# Altium PCB ISL-IP_LAYOUT.PcbDoc
Units mm, origin at the board's own origin, x right, y up, seen from the top; angles counter-clockwise.
Board outline 388 x 82 mm, 4 copper layers (Top Layer, Signal Layer 1, Signal Layer 2, Bottom Layer), stack 1.753 mm thick; 21 components, 2 nets, 45 pads, 402 vias.
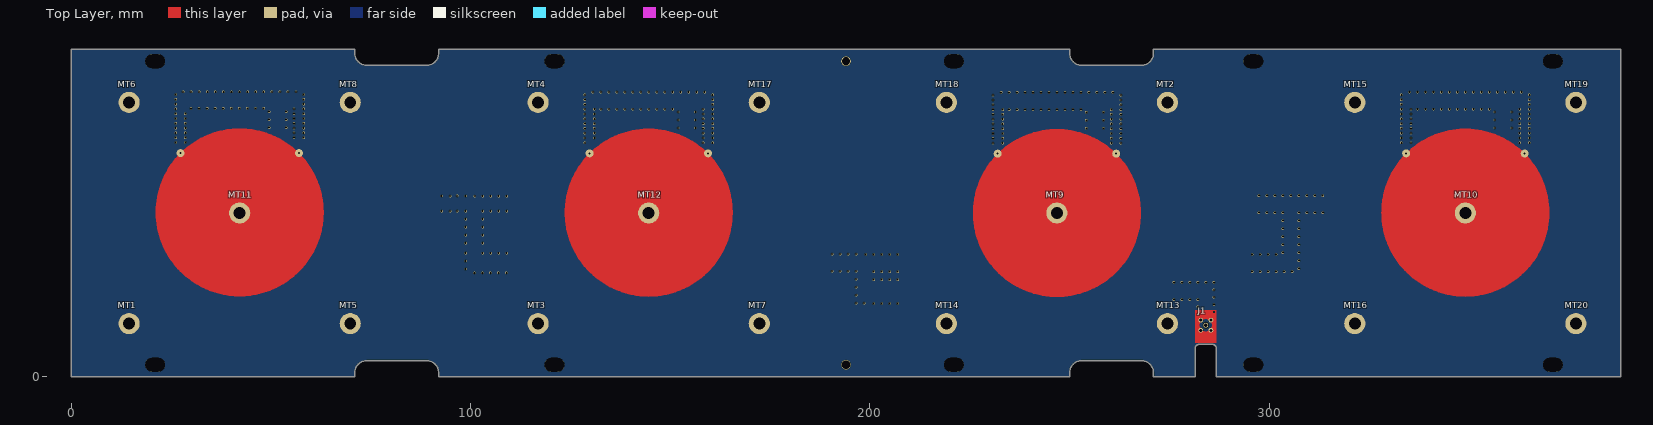
[diagram p0: Top Layer view]
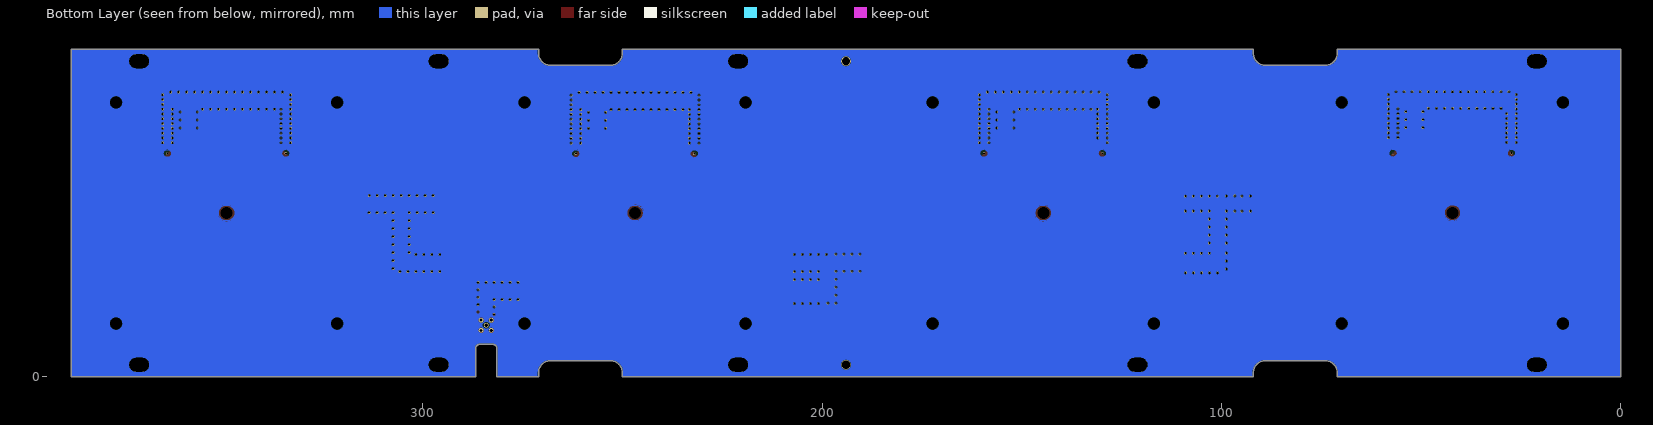
[diagram p1: Bottom Layer view, seen from below]
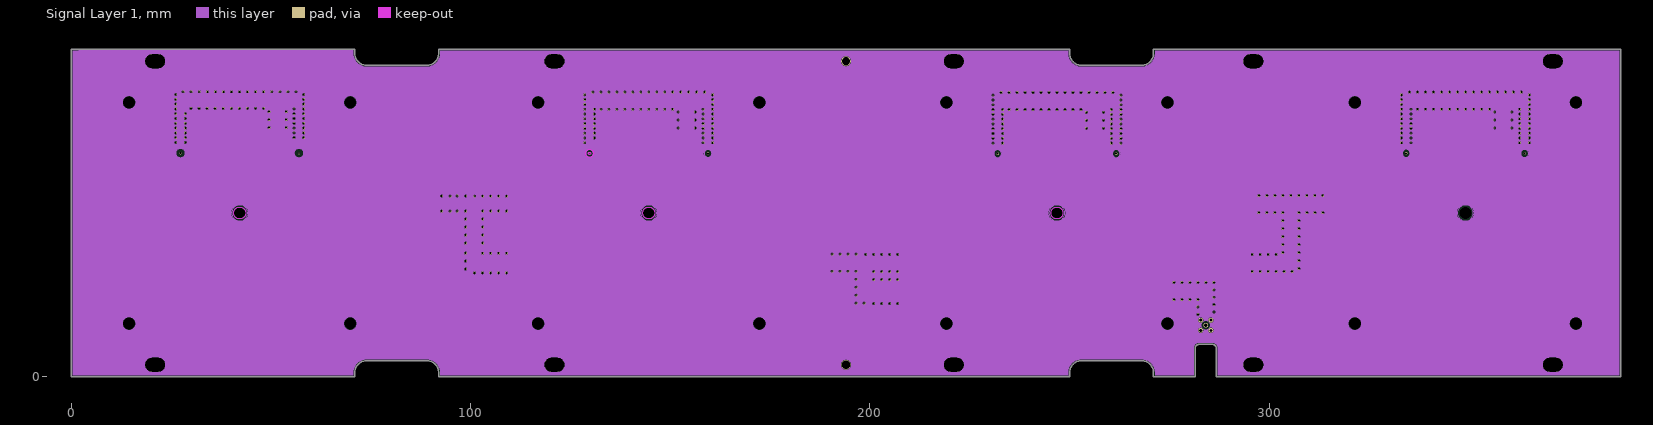
[diagram p2: Signal Layer 1]
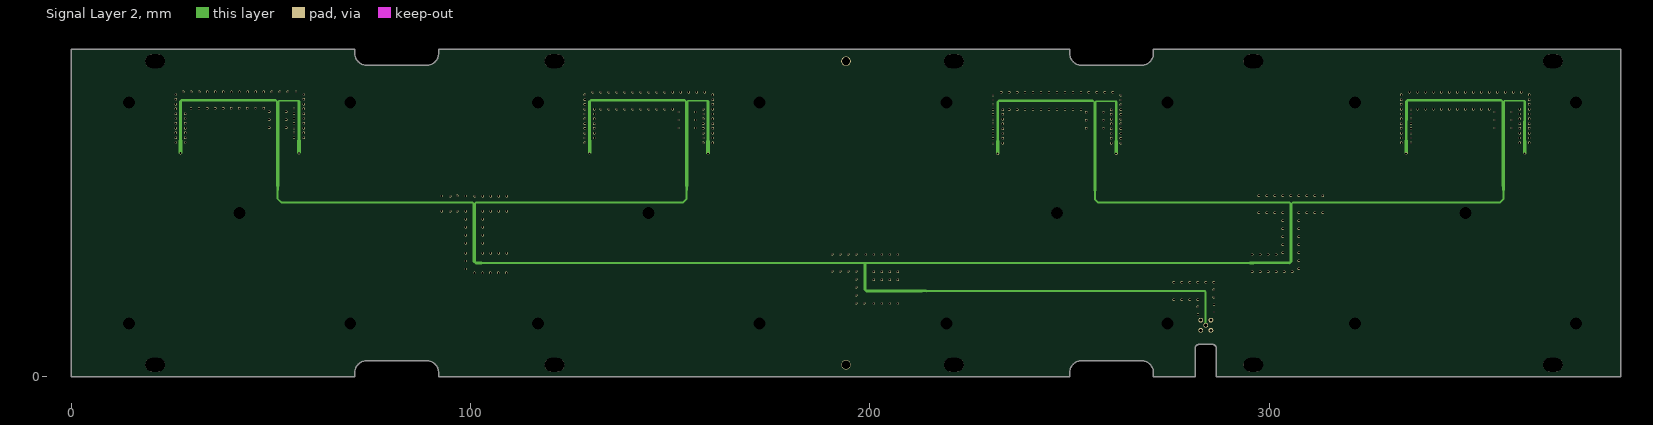
[diagram p3: Signal Layer 2]

## Layer stack, top to bottom
Top Solder: solder mask 0.0102, Solder Resist, Dk 3.5
Top Layer: signal copper 0.035
Dielectric 1: core 0.813, RO4003C, Dk 3.38
Signal Layer 1: signal copper 0.035
Dielectric 2: core 0.2, Composite dielectric, Dk 3.5
Dielectric 3: core 0.2, Composite dielectric, Dk 3.5
Signal Layer 2: signal copper 0.035
Dielectric 4: core 0.2, Composite dielectric, Dk 3.5
Dielectric 5: core 0.2, Composite dielectric, Dk 3.5
Bottom Layer: signal copper 0.035
Bottom Solder: solder mask 0.0102, Solder Resist, Dk 3.5

## Board outline
0,0 71,0 71,1 cw(c74,1) 71.879,3.121 cw(c74,1) 74,4 89,4 cw(c89,1) 91.121,3.121 cw(c89,1) 92,1 92,0 250,0 250,1 cw(c253,1) 250.879,3.121 cw(c253,1) 253,4 268,4 cw(c268,1) 270.121,3.121 cw(c268,1) 271,1 271,0 281.432,0 281.432,7.1 cw(c282.432,7.1) 281.725,7.807 cw(c282.432,7.1) 282.432,8.1 285.734,8.1 cw(c285.734,7.1) 286.441,7.807 cw(c285.734,7.1) 286.734,7.1 286.734,0 388,0 388,82 271,82 271,81 cw(c268,81) 270.121,78.879 cw(c268,81) 268,78 253,78 cw(c253,81) 250.879,78.879 cw(c253,81) 250,81 250,82 92,82 92,81 cw(c89,81) 91.121,78.879 cw(c89,81) 89,78 74,78 cw(c74,81) 71.879,78.879 cw(c74,81) 71,81 71,82 0,82

## Design rules (kind name [scope] priority, off if disabled: settings)
BoardOutlineClearance [All] p1: gap=0.254 ignorepadtopadclearanceinfootprint=FALSE except(0: Arc-SplitContinuation Track-SplitContinuation SMDPad-SplitContinuation THPad-SplitContinuation Via-SplitContinuation Fill-SplitContinuation Poly-SplitContinuation Region-SplitContinuation Text-SplitContinuation)
Clearance Clearance_1 [All] p1 off: gap=0.254 ignorepadtopadclearanceinfootprint=FALSE except(0: Arc-Hole Track-Hole SMDPad-Hole THPad-Hole Via-Hole Fill-Hole Poly-Hole Region-Hole Text-Hole)
DiffPairsRouting [All] p1 off: maxlimit=0.254 minlimit=0.254 mostfreqgap=0.254 toplayer_minwidth=0.381 toplayer_maxwidth=0.381 toplayer_prefwidth=0.381 midlayer1_minwidth=0.381 midlayer1_maxwidth=0.381 midlayer1_prefwidth=0.381 midlayer2_minwidth=0.381 midlayer2_maxwidth=0.381 midlayer2_prefwidth=0.381 bottomlayer_minwidth=0.381 bottomlayer_maxwidth=0.381 bottomlayer_prefwidth=0.381 maxuncoupledlength=12.7
FanoutControl Fanout_BGA [IsBGA] p1 off: bgadir=Out bgaviamode=Centered fanoutstyle=Auto fanoutdirection=Alternating viagrid=0.025 // Fanout_BGA (Default Rule)
FanoutControl Fanout_LCC [IsLCC] p2 off: bgadir=Out bgaviamode=Centered fanoutstyle=Auto fanoutdirection=Alternating viagrid=0.025 // Fanout_LCC (Default Rule)
FanoutControl Fanout_SOIC [IsSOIC] p3 off: bgadir=Out bgaviamode=Centered fanoutstyle=Auto fanoutdirection=Alternating viagrid=0.025 // Fanout_SOIC (Default Rule)
FanoutControl Fanout_Small [(CompPinCount < 5)] p4 off: bgadir=Out bgaviamode=Centered fanoutstyle=Auto fanoutdirection=OutThenIn viagrid=0.025 // Fanout_Small (Default Rule)
FanoutControl Fanout_Default [All] p5 off: bgadir=Out bgaviamode=Centered fanoutstyle=Auto fanoutdirection=Alternating viagrid=0.025 // Fanout_Default (Default Rule)
HoleSize [All] p1: absolutevalues=TRUE maxlimit=5 minlimit=0.025 maxpercent=80.000 minpercent=20.000
PolygonConnect [All] p1: connectstyle=NoConnect reliefconductorwidth=0.254 reliefentries=4 polygonreliefangle="90 Angle" airgapwidth=0.254
RoomDefinition am2067_4R_PCB [InComponentClass('am2067_4R_PCB')] p1: confinementstyle=ConfineIn formatcopy=TRUE lockcomponents=FALSE outline -141.402,-204.877 -90.602,-204.877 -90.602,-179.477 -141.402,-179.477
RoutingCorners [All] p1 off: cornerstyle=45-Degree minsetback=2.54 maxsetback=2.54
RoutingLayers [All] p1 off: top layer_v5=TRUE mid layer 1_v5=TRUE mid layer 2_v5=TRUE bottom layer_v5=TRUE
RoutingPriority [All] p1 off: routingpriority=0
RoutingTopology [All] p1 off: topology=Shortest
RoutingVias [All] p1 off: holewidth=0.711 width=1.27 viastyle="Through Hole" minholewidth=0.711 minwidth=1.27 maxholewidth=0.711 maxwidth=1.27
ShortCircuit [All] p1: allowed=TRUE
SolderMaskExpansion [All] p1: expansion=0.102
Width [All] p1 off: maxlimit=0.254 minlimit=0.254 preferedwidth=0.254
18 further rules are at their usual default settings.

## Classes and differential pairs
component class am2067_4R_PCB: MT6

## Components (designator, comment, footprint, x,y, rotation, side; value= is the part's Value field where it differs from the comment)
J1 "SMP Male R/A TH" SF1212-6000-TD 284.1,12.9 r0 top
MT1 "9774060243R" SMT_spacer_M2_6mm 14.48,13.31 r0 top
MT2 "9774060243R" SMT_spacer_M2_6mm 274.5,68.69 r0 top
MT3 "9774060243R" SMT_spacer_M2_6mm 116.91,13.31 r0 top
MT4 "9774060243R" SMT_spacer_M2_6mm 116.91,68.69 r0 top
MT5 "9774060243R" SMT_spacer_M2_6mm 69.86,13.31 r0 top
MT6 "9774060243R" SMT_spacer_M2_6mm 14.48,68.69 r0 top
MT7 "9774060243R" SMT_spacer_M2_6mm 172.29,13.31 r0 top
MT8 "9774060243R" SMT_spacer_M2_6mm 69.86,68.69 r0 top
MT9 "9774060243R modified with no plating through the hole (specific case to ISL-IP component)" "SMT_spacer_M2_6mm differentiation with CMP-024-0033" 246.82,41 r0 top
MT10 "9774060243R modified with no plating through the hole (specific case to ISL-IP component)" "SMT_spacer_M2_6mm differentiation with CMP-024-0033" 349.09,41 r0 top
MT11 "9774060243R modified with no plating through the hole (specific case to ISL-IP component)" "SMT_spacer_M2_6mm differentiation with CMP-024-0033" 42.17,41 r0 top
MT12 "9774060243R modified with no plating through the hole (specific case to ISL-IP component)" "SMT_spacer_M2_6mm differentiation with CMP-024-0033" 144.6,41 r0 top
MT13 "9774060243R" SMT_spacer_M2_6mm 274.5,13.31 r0 top
MT14 "9774060243R" SMT_spacer_M2_6mm 219.13,13.31 r0 top
MT15 "9774060243R" SMT_spacer_M2_6mm 321.4,68.69 r0 top
MT16 "9774060243R" SMT_spacer_M2_6mm 321.4,13.31 r0 top
MT17 "9774060243R" SMT_spacer_M2_6mm 172.29,68.69 r0 top
MT18 "9774060243R" SMT_spacer_M2_6mm 219.13,68.69 r0 top
MT19 "9774060243R" SMT_spacer_M2_6mm 376.78,68.69 r0 top
MT20 "9774060243R" SMT_spacer_M2_6mm 376.78,13.31 r0 top

## Footprints (in the part's own frame and the unit in brackets; to place one, negate y for a bottom-side part, rotate by r counter-clockwise, add the part's x,y. Pads: shape width x height; smd on the part's side, far side on the other; paste and mask are expansions set on the pad)
SF1212-6000-TD [mm] "SMP Male PCB Thru-Hole Connector, R/A, FD"
  round 1.2 hole 0.76: 0(-1.27,-1.27) 0(-1.27,1.27) 0(1.27,-1.27) 0(1.27,1.27)
  round 1.2 hole 0.84: 1(0,0)
  body extent -2,-6.46 2.17,1.66, height 4.46
SMT_spacer_M2_6mm [mm] "Pem Nut , Surface Mount Nuts and Spacers/Standoffs"
  round 5.3 / inner oval 5.3x0 / far side oval 5.3x0 hole 3 paste-6: 1(0,0)
  body extent -2.17,-2.17 2.18,2.17, height 6
"SMT_spacer_M2_6mm differentiation with CMP-024-0033" [mm] "Pem Nut , Surface Mount Nuts and Spacers/Standoffs"
  round 5.3 / inner oval 5.3x0 / far side oval 5.3x0 hole 3 paste-6: 1(0,0)
  body extent -2.17,-2.17 2.18,2.17, height 6

## Part data
J1: library part CMP-026-0147-5, "SMP Male PCB Thru-Hole Connector, R/A, FD", Manufacturer="Amphenol / SV Microwave", Manufacturer number=SF1212-6000, Height=4.2mm, InternalID=100288
MT1 MT2 MT3 MT4 MT5 MT6 MT7 MT8 MT13 MT14 MT15 MT16 MT17 MT18 MT19 MT20: library part CMP-024-0033-5, "Pem nut, Surface Mount Nuts and Spacer, M2, 6mm", Manufacturer="Wurth Electronik", Part Number=SMTSO-M3-3ET, Height=6mm, InternalID=100666, Manufacturer number=9774060243R, Old DB Number=17000000, Part status=Prototype, Symbol Name=MT_hole_1
MT9 MT10 MT11 MT12: library part CMP-024-0036-6, "Pem nut, Surface Mount Nuts and Spacer, M2, 6mm", Manufacturer="Wurth Electronik", Manufacturer number=9774060243R, Part Number=SMTSO-M3-3ET, Height=6mm, InternalID=100666, Old DB Number=17000000, Part status=Prototype, Symbol Name=MT_hole_1

## Free pads (board coordinates)
  round 2 smd: 3(27.352,56.008) 3(57.019,56.008) 3(129.781,55.938) 3(159.448,55.938) 3(231.969,55.849) 3(261.668,55.849) 3(334.271,55.938) 3(363.938,55.902)
  oval 4.9x3.4 hole 3.4 slot 4.9 at 0 deg unplated: 6(21,3) 6(21,79) 6(121,3) 6(121,79) 6(221,3) 6(221,79) 6(296,3) 6(296,79) 6(371,3) 6(371,79)
  round 2.4 hole 2.1 unplated: 6(194,79)
  round 2.4 hole 2.2 unplated: 6(194,3)

## Via types
v1: diameter 0.6, hole 0.5, Top Layer to Bottom Layer, 402 vias

## Nets (pads, with @x,y where several pads share a name; then routed paths per layer and width w, separated by ;. In a path a pad name is that pad's centre, name@x,y a point inside that pad or via, vN(x,y) a via of type N, cw(c..) or ccw(c..) an arc to the next point about the centre after c; other vN are vias at no path point)
GND: J1.0 MT1.1 MT2.1 MT3.1 MT4.1 MT5.1 MT6.1 MT7.1 MT8.1 MT13.1 MT14.1 MT15.1 MT16.1 MT17.1 MT18.1 MT19.1 MT20.1 pad.6
  other v1: 282.132,15.624 286.147,16.211 282.125,17.475 286.139,18.063 200.926,18.33 202.926,18.33 204.926,18.33 206.926,18.33 196.524,18.42 198.524,18.42 276.118,19.326 278.118,19.326 280.118,19.326 282.118,19.326 286.132,19.914 196.524,20.42 286.125,21.765 196.524,22.42 276.118,23.616 278.118,23.616 280.118,23.616 282.118,23.616 284.118,23.616 286.118,23.616 200.926,24.33 202.926,24.33 204.926,24.33 206.926,24.33 196.524,24.42 100.964,26.019 102.964,26.019 104.964,26.019 106.964,26.019 108.964,26.019 200.926,26.33 202.926,26.33 204.926,26.33 206.926,26.33 295.726,26.33 297.726,26.33 299.726,26.33 301.726,26.33 303.726,26.33 305.726,26.33 190.524,26.42 192.524,26.42 194.524,26.42 196.524,26.42 98.764,26.969 307.419,27.075 98.764,28.969 307.419,29.075 198.926,30.62 200.926,30.619 202.926,30.619 204.926,30.619 206.926,30.619 295.726,30.62 297.726,30.62 299.726,30.62 301.726,30.62 190.524,30.709 192.524,30.709 194.524,30.709 196.524,30.709 103.036,30.931 105.036,30.931 107.036,30.931 109.036,30.931 98.764,30.969 303.381,31.075 307.419,31.075 303.381,33.075 307.419,33.075 98.764,33.469 103.036,33.469 303.381,35.075 307.419,35.075 98.764,35.469 103.036,35.469 303.381,37.075 307.419,37.075 98.764,37.469 103.036,37.469 303.381,39.075 307.419,39.075 98.764,39.469 103.036,39.469 297.381,41.075 299.381,41.075 301.381,41.075 303.381,41.075 307.419,41.075 309.419,41.075 311.419,41.075 313.419,41.075 92.726,41.469 94.862,41.469 96.628,41.469 98.764,41.469 103.036,41.469 105.036,41.469 107.036,41.469 109.036,41.469 101.036,45.22 103.036,45.22 105.036,45.22 107.036,45.22 109.036,45.22 94.862,45.238 92.726,45.257 98.764,45.257 96.628,45.276 297.381,45.365 299.381,45.365 301.381,45.365 303.381,45.365 305.381,45.365 307.381,45.365 309.381,45.365 311.381,45.365 313.381,45.365 230.81,58.502 233.21,58.502 260.435,58.502 262.835,58.502 128.59,58.591 158.215,58.591 160.615,58.591 333.08,58.591 335.48,58.591 362.705,58.591 365.105,58.591 26.161,58.661 28.561,58.661 230.81,59.702 233.21,59.702 260.435,59.702 262.835,59.702 128.59,59.791 130.99,59.791 158.215,59.791 160.615,59.791 333.08,59.791 335.48,59.791 362.705,59.791 365.105,59.791 26.161,59.861 28.561,59.861 55.786,59.861 58.186,59.861 230.81,60.902 233.21,60.902 260.435,60.902 262.835,60.902 128.59,60.991 130.99,60.991 158.215,60.991 160.615,60.991 333.08,60.991 335.48,60.991 362.705,60.991 365.105,60.991 26.161,61.061 28.561,61.061 55.786,61.061 58.186,61.061 230.81,62.102 233.21,62.102 260.435,62.102 262.835,62.102 128.59,62.191 130.99,62.191 158.215,62.191 160.615,62.191 333.08,62.191 335.48,62.191 362.705,62.191 365.105,62.191 254.19,62.202 258.48,62.202 26.161,62.261 28.561,62.261 55.786,62.261 58.186,62.261 151.97,62.291 156.26,62.291 356.46,62.291 360.75,62.291 49.541,62.361 53.831,62.361 230.81,63.302 233.21,63.302 260.435,63.302 262.835,63.302 128.59,63.391 130.99,63.391 158.215,63.391 160.615,63.391 333.08,63.391 335.48,63.391 362.705,63.391 365.105,63.391 26.161,63.461 28.561,63.461 55.786,63.461 58.186,63.461 254.19,64.202 258.48,64.202 151.97,64.291 156.26,64.291 356.46,64.291 360.75,64.291 49.541,64.361 53.831,64.361 230.81,64.502 233.21,64.502 260.435,64.502 262.835,64.502 128.59,64.591 130.99,64.591 158.215,64.591 160.615,64.591 333.08,64.591 335.48,64.591 362.705,64.591 365.105,64.591 26.161,64.661 28.561,64.661 55.786,64.661 58.186,64.661 230.81,65.702 233.21,65.702 260.435,65.702 262.835,65.702 128.59,65.791 130.99,65.791 158.215,65.791 160.615,65.791 333.08,65.791 335.48,65.791 362.705,65.791 365.105,65.791 26.161,65.861 28.561,65.861 55.786,65.861 58.186,65.861 254.19,66.202 258.48,66.202 151.97,66.291 156.26,66.291 356.46,66.291 360.75,66.291 49.541,66.361 53.831,66.361 230.81,66.902 233.21,66.902 234.835,66.902 236.835,66.902 238.835,66.902 240.835,66.902 242.835,66.902 244.835,66.902 246.835,66.902 248.835,66.902 250.835,66.902 252.835,66.902 260.435,66.902 262.835,66.902 128.59,66.991 130.99,66.991 132.615,66.991 134.615,66.991 136.615,66.991 138.615,66.991 140.615,66.991 142.615,66.991 144.615,66.991 146.615,66.991 148.615,66.991 150.615,66.991 158.215,66.991 160.615,66.991 333.08,66.991 335.48,66.991 337.105,66.991 339.105,66.991 341.105,66.991 343.105,66.991 345.105,66.991 347.105,66.991 349.105,66.991 351.105,66.991 353.105,66.991 355.105,66.991 362.705,66.991 365.105,66.991 26.161,67.061 55.786,67.061 58.186,67.061 29.974,67.199 31.994,67.199 34.014,67.199 36.034,67.199 38.054,67.199 40.074,67.199 42.094,67.199 44.114,67.199 46.134,67.199 48.154,67.199 230.81,68.102 262.835,68.102 128.59,68.191 160.615,68.191 333.08,68.191 365.105,68.191 26.161,68.261 58.186,68.261 230.81,69.302 262.835,69.302 128.59,69.391 160.615,69.391 333.08,69.391 365.105,69.391 26.161,69.461 58.186,69.461 230.81,70.502 262.835,70.502 128.59,70.591 160.615,70.591 333.08,70.591 365.105,70.591 26.161,70.661 58.186,70.661 232.835,71.192 234.835,71.192 236.835,71.192 238.835,71.192 240.835,71.192 242.835,71.192 244.835,71.192 246.835,71.192 248.835,71.192 250.835,71.192 252.835,71.192 254.835,71.192 256.835,71.192 258.835,71.192 260.835,71.192 130.615,71.281 132.615,71.281 134.615,71.281 136.615,71.281 138.615,71.281 140.615,71.281 142.615,71.281 144.615,71.281 146.615,71.281 148.615,71.281 150.615,71.281 152.615,71.281 154.615,71.281 156.615,71.281 158.615,71.281 335.105,71.281 337.105,71.281 339.105,71.281 341.105,71.281 343.105,71.281 345.105,71.281 347.105,71.281 349.105,71.281 351.105,71.281 353.105,71.281 355.105,71.281 357.105,71.281 359.105,71.281 361.105,71.281 363.105,71.281 27.996,71.351 30.016,71.351 32.036,71.351 34.056,71.351 36.076,71.351 38.096,71.351 40.116,71.351 42.136,71.351 44.156,71.351 46.176,71.351 48.196,71.351 50.216,71.351 52.236,71.351 54.256,71.351 56.276,71.351
NetJ1_1: J1.1 MT9.1 MT10.1 MT11.1 MT12.1 pad.3
  other v1: 231.969,55.849 261.668,55.849 363.938,55.902 129.781,55.938 159.448,55.938 334.271,55.938 27.352,56.008 57.019,56.008
copper on no net: | length 207.3
  Signal Layer 1 w0: 335.271,55.938 ccw(c334.271,55.938) 335.271,55.938 ; 335.271,55.938 ccw(c334.271,55.938) 335.271,55.938 ; 364.938,55.902 ccw(c363.938,55.902) 364.938,55.902 ; 364.938,55.902 ccw(c363.938,55.902) 364.938,55.902 ; 160.448,55.938 ccw(c159.448,55.938) 160.448,55.938 ; 232.969,55.849 ccw(c231.969,55.849) 232.969,55.849 ; 262.668,55.849 ccw(c261.668,55.849) 262.668,55.849
  Signal Layer 1 w0.1: 44.17,41 ccw(c42.17,41) 44.17,41 ; 130.781,55.938 ccw(c129.781,55.938) 130.781,55.938 ; 146.6,41 ccw(c144.6,41) 146.6,41 ; 248.82,41 ccw(c246.82,41) 248.82,41 ; 351.09,41 ccw(c349.09,41) 351.09,41
  Bottom Layer w0: 28.352,56.008 ccw(c27.352,56.008) 28.352,56.008 ; 44.116,41.071 ccw(c42.116,41.071) 44.116,41.071 ; 58.019,56.008 ccw(c57.019,56.008) 58.019,56.008 ; 130.781,55.938 ccw(c129.781,55.938) 130.781,55.938 ; 146.6,41 ccw(c144.6,41) 146.6,41 ; 160.448,55.938 ccw(c159.448,55.938) 160.448,55.938 ; 232.969,55.849 ccw(c231.969,55.849) 232.969,55.849 ; 248.82,41 ccw(c246.82,41) 248.82,41 ; 262.668,55.849 ccw(c261.668,55.849) 262.668,55.849 ; 335.271,55.938 ccw(c334.271,55.938) 335.271,55.938 ; 351.09,41 ccw(c349.09,41) 351.09,41 ; 364.938,55.902 ccw(c363.938,55.902) 364.938,55.902
  Bottom Layer w0.1: 285.1,12.9 ccw(c284.1,12.9) 285.1,12.9

## Polygon pours and split planes (outlines as drawn)
no net on Signal Layer 2 "Signal Layer 2-No Net" (solid, pour order 16): -141.402,234.573 -141.402,390.723 -141.402,403.123
no net on Signal Layer 1 "Top Layer-No Net" (none, pour order 22): 230.969,55.849 ccw(c231.969,55.849) 231.969,54.849 ccw(c231.969,55.849) 232.969,55.849 ccw(c231.969,55.849) 231.969,56.849 ccw(c231.969,55.849)
no net on Signal Layer 1 "Top Layer-No Net" (none, pour order 24): 260.668,55.849 ccw(c261.668,55.849) 261.668,54.849 ccw(c261.668,55.849) 262.668,55.849 ccw(c261.668,55.849) 261.668,56.849 ccw(c261.668,55.849)
no net on Signal Layer 1 "Top Layer-No Net" (none, pour order 28): 230.969,55.849 ccw(c231.969,55.849) 231.969,54.849 ccw(c231.969,55.849) 232.969,55.849 ccw(c231.969,55.849) 231.969,56.849 ccw(c231.969,55.849)
no net on Signal Layer 1 "Top Layer-No Net" (none, pour order 18): 128.781,55.938 ccw(c129.781,55.938) 129.781,54.938 ccw(c129.781,55.938) 130.781,55.938 ccw(c129.781,55.938) 129.781,56.938 ccw(c129.781,55.938)
no net on Signal Layer 1 "Top Layer-No Net" (none, pour order 32): 128.781,55.938 ccw(c129.781,55.938) 129.781,54.938 ccw(c129.781,55.938) 130.781,55.938 ccw(c129.781,55.938) 129.781,56.938 ccw(c129.781,55.938)
no net on Signal Layer 1 "Top Layer-No Net" (none, pour order 20): 158.448,55.938 ccw(c159.448,55.938) 159.448,54.938 ccw(c159.448,55.938) 160.448,55.938 ccw(c159.448,55.938) 159.448,56.938 ccw(c159.448,55.938)
no net on Signal Layer 1 "Top Layer-No Net" (none, pour order 30): 158.448,55.938 ccw(c159.448,55.938) 159.448,54.938 ccw(c159.448,55.938) 160.448,55.938 ccw(c159.448,55.938) 159.448,56.938 ccw(c159.448,55.938)

## Keep-outs
Signal Layer 1:
  region: 253 vertices and 1 holes, not listed, extent 40.669,39.499 43.671,42.501
  region: 253 vertices and 1 holes, not listed, extent 143.099,39.499 146.101,42.501
  region: 253 vertices and 1 holes, not listed, extent 245.319,39.499 248.321,42.501
  region: 131 vertices and 1 holes, not listed, extent 129.48,55.637 130.082,56.239
  region: 65 vertices and 1 holes, not listed, extent 128.781,54.938 130.781,56.937

## Other copper
Top Layer:
  region net NetJ1_1: 246.856,42.314 246.489,41.947 246.434,41.927 246.345,41.885 246.261,41.835 246.182,41.776 246.109,41.71 246.043,41.637 245.984,41.558 245.933,41.473 245.891,41.384 245.858,41.291 245.834,41.196 245.82,41.098 245.815,41 245.819,40.91 245.803,40.895 245.699,40.851 231.35,55.199 231.651,55.52 231.831,55.704 231.878,55.665 231.917,55.645 231.958,55.632 232.001,55.628 232.045,55.632 232.086,55.645 232.124,55.665 232.158,55.693 232.186,55.726 232.206,55.764 232.219,55.806 232.223,55.849 232.219,55.892 232.206,55.934 232.186,55.972 232.158,56.006 232.157,56.029 232.299,56.168 232.661,56.508
  region net NetJ1_1: 261.339,56.168 261.485,56.025 261.457,55.99 261.433,55.946 261.419,55.899 261.414,55.849 261.419,55.8 261.433,55.752 261.457,55.708 261.488,55.67 261.527,55.638 261.571,55.615 261.618,55.6 261.668,55.596 261.717,55.6 261.765,55.615 261.809,55.638 261.843,55.666 261.986,55.52 262.287,55.199 247.938,40.851 247.834,40.895 247.818,40.91 247.822,41 247.817,41.098 247.803,41.196 247.779,41.291 247.746,41.384 247.704,41.473 247.653,41.558 247.594,41.637 247.528,41.71 247.455,41.776 247.376,41.835 247.292,41.885 247.203,41.927 247.149,41.947 246.732,42.363 260.925,56.555
  region: 144.595,42.361 144.268,42.035 144.214,42.016 144.125,41.974 144.041,41.923 143.962,41.864 143.889,41.798 143.823,41.725 143.764,41.646 143.713,41.562 143.671,41.472 143.638,41.38 143.614,41.284 143.6,41.187 143.595,41.088 143.599,40.998 143.583,40.983 143.479,40.939 129.13,55.288 129.431,55.608 129.6,55.782 129.625,55.781 129.658,55.753 129.696,55.733 129.738,55.72 129.781,55.716 129.824,55.72 129.866,55.733 129.904,55.753 129.938,55.781 129.965,55.815 129.986,55.853 129.998,55.894 130.003,55.938 129.998,55.981 129.986,56.022 129.965,56.061 129.938,56.094 129.937,56.118 130.078,56.256 130.399,56.557
  region net NetJ1_1: 363.608,56.256 363.755,56.113 363.727,56.079 363.703,56.035 363.689,55.987 363.684,55.938 363.689,55.888 363.703,55.841 363.727,55.797 363.758,55.758 363.797,55.727 363.841,55.703 363.888,55.689 363.938,55.684 363.987,55.689 364.035,55.703 364.079,55.727 364.113,55.755 364.256,55.608 364.644,55.194 350.336,40.885 350.103,40.983 350.088,40.998 350.092,41.088 350.087,41.187 350.073,41.284 350.049,41.38 350.016,41.472 349.974,41.562 349.923,41.646 349.864,41.725 349.798,41.798 349.725,41.864 349.646,41.923 349.562,41.974 349.472,42.016 349.418,42.035 348.982,42.471 363.174,56.663
  region net NetJ1_1: 42.166,42.432 41.84,42.106 41.785,42.086 41.696,42.044 41.612,41.994 41.533,41.935 41.46,41.869 41.394,41.796 41.335,41.717 41.284,41.632 41.242,41.543 41.209,41.45 41.185,41.355 41.171,41.257 41.166,41.159 41.17,41.069 41.154,41.054 41.05,41.01 26.701,55.358 27.002,55.679 27.172,55.853 27.196,55.852 27.229,55.824 27.267,55.804 27.309,55.791 27.352,55.787 27.395,55.791 27.437,55.804 27.475,55.824 27.509,55.852 27.536,55.885 27.557,55.924 27.57,55.965 27.574,56.008 27.57,56.052 27.557,56.093 27.536,56.131 27.509,56.165 27.508,56.188 27.649,56.327 27.97,56.627
  region net NetJ1_1: 241 vertices and 0 holes, not listed, extent 21.172,20.162 63.167,55.355
  region net NetJ1_1: 56.689,56.327 56.836,56.184 56.808,56.149 56.784,56.105 56.77,56.058 56.765,56.008 56.77,55.959 56.784,55.911 56.808,55.867 56.839,55.829 56.878,55.797 56.922,55.774 56.969,55.759 57.019,55.755 57.068,55.759 57.116,55.774 57.16,55.797 57.194,55.826 57.337,55.679 57.638,55.358 43.289,41.01 43.185,41.054 43.169,41.069 43.173,41.159 43.168,41.257 43.154,41.355 43.13,41.45 43.097,41.543 43.055,41.632 43.004,41.717 42.945,41.796 42.879,41.869 42.806,41.935 42.727,41.994 42.643,42.044 42.554,42.086 42.499,42.106 42.173,42.432 56.369,56.627
  region net NetJ1_1: 42.628,62.152 43.085,62.137 43.543,62.112 44,62.077 44.455,62.032 44.91,61.977 45.364,61.912 45.816,61.838 46.266,61.753 46.714,61.659 47.16,61.555 47.604,61.441 48.045,61.318 48.484,61.185 48.919,61.042 49.351,60.89 49.78,60.729 50.205,60.558 50.626,60.378 51.043,60.189 51.456,59.991 51.865,59.784 52.269,59.568 52.668,59.343 53.062,59.11 53.451,58.868 53.835,58.618 54.213,58.359 54.585,58.092 54.952,57.817 55.312,57.535 55.666,57.244 56.014,56.946 56.27,56.716 58.093,54.817 43.289,41.01 27.975,56.632 28.325,56.946 28.673,57.244 29.027,57.535 29.387,57.817 29.753,58.092 30.126,58.359 30.504,58.618 30.888,58.868 31.277,59.11 31.671,59.343 32.07,59.568 32.474,59.784 32.883,59.991 33.296,60.189 33.713,60.378 34.134,60.558 34.559,60.729 34.988,60.89 35.42,61.042 35.855,61.185 36.294,61.318 36.735,61.441 37.179,61.555 37.625,61.659 38.073,61.753 38.523,61.838 38.975,61.912 39.429,61.977 39.884,62.032 40.339,62.077 40.796,62.112 41.254,62.137 41.711,62.152 42.169,62.157
  region net NetJ1_1: 241 vertices and 0 holes, not listed, extent 123.601,20.091 165.596,55.297
  region net NetJ1_1: 145.056,62.081 145.514,62.066 145.972,62.041 146.428,62.006 146.884,61.961 147.339,61.906 147.793,61.841 148.245,61.767 148.695,61.682 149.143,61.588 149.589,61.484 150.033,61.37 150.474,61.247 150.912,61.114 151.348,60.972 151.78,60.82 152.209,60.658 152.634,60.488 153.055,60.308 153.472,60.119 153.885,59.92 154.294,59.713 154.698,59.497 155.097,59.273 155.491,59.039 155.88,58.797 156.264,58.547 156.642,58.288 157.014,58.022 157.381,57.747 157.741,57.464 158.095,57.173 158.443,56.875 158.806,56.549 144.61,42.353 130.403,56.561 130.754,56.875 131.101,57.173 131.456,57.464 131.816,57.747 132.182,58.022 132.555,58.288 132.933,58.547 133.316,58.797 133.705,59.039 134.1,59.273 134.499,59.497 134.903,59.713 135.311,59.92 135.724,60.119 136.142,60.308 136.563,60.488 136.988,60.658 137.417,60.82 137.849,60.972 138.284,61.114 138.723,61.247 139.164,61.37 139.608,61.484 140.054,61.588 140.502,61.682 140.952,61.767 141.404,61.841 141.858,61.906 142.312,61.961 142.768,62.006 143.225,62.041 143.682,62.066 144.14,62.081 144.598,62.086
  region: 159.118,56.256 159.265,56.113 159.237,56.079 159.213,56.035 159.199,55.987 159.194,55.938 159.199,55.888 159.213,55.841 159.237,55.797 159.268,55.758 159.307,55.727 159.351,55.703 159.398,55.689 159.448,55.684 159.497,55.689 159.545,55.703 159.589,55.727 159.623,55.755 159.766,55.608 160.067,55.288 145.718,40.939 145.613,40.983 145.598,40.998 145.602,41.088 145.597,41.187 145.583,41.284 145.559,41.38 145.526,41.472 145.484,41.562 145.433,41.646 145.374,41.725 145.308,41.798 145.235,41.864 145.156,41.923 145.072,41.974 144.982,42.016 144.928,42.035 144.602,42.361 158.798,56.557
  region net NetJ1_1: 241 vertices and 0 holes, not listed, extent 225.821,20.003 267.816,55.246
  region net NetJ1_1: 247.277,61.992 247.734,61.977 248.192,61.952 248.649,61.918 249.105,61.873 249.559,61.818 250.013,61.753 250.465,61.678 250.915,61.594 251.363,61.5 251.809,61.396 252.253,61.282 252.694,61.159 253.133,61.026 253.568,60.883 254,60.731 254.429,60.57 254.854,60.399 255.275,60.219 255.692,60.03 256.106,59.832 256.514,59.625 256.918,59.409 257.317,59.184 257.711,58.951 258.101,58.709 258.484,58.459 258.862,58.2 259.235,57.933 259.601,57.658 259.961,57.376 260.315,57.085 260.663,56.787 261.014,56.472 246.819,42.277 232.623,56.472 232.974,56.787 233.322,57.085 233.676,57.376 234.036,57.658 234.403,57.933 234.775,58.2 235.153,58.459 235.537,58.709 235.926,58.951 236.32,59.184 236.719,59.409 237.123,59.625 237.532,59.832 237.945,60.03 238.362,60.219 238.783,60.399 239.208,60.57 239.637,60.731 240.069,60.883 240.505,61.026 240.943,61.159 241.384,61.282 241.828,61.396 242.274,61.5 242.722,61.594 243.172,61.678 243.624,61.753 244.078,61.818 244.533,61.873 244.989,61.918 245.445,61.952 245.903,61.977 246.361,61.992 246.819,61.997
  region net NetJ1_1: 241 vertices and 0 holes, not listed, extent 328.091,20.091 370.086,55.335
  region net NetJ1_1: 349.085,42.361 348.758,42.035 348.704,42.016 348.615,41.974 348.531,41.923 348.452,41.864 348.379,41.798 348.313,41.725 348.254,41.646 348.203,41.562 348.161,41.472 348.128,41.38 348.104,41.284 348.09,41.187 348.085,41.088 348.089,40.998 348.073,40.983 347.969,40.939 333.62,55.288 333.921,55.608 334.09,55.782 334.115,55.781 334.148,55.753 334.186,55.733 334.228,55.72 334.271,55.716 334.314,55.72 334.356,55.733 334.394,55.753 334.428,55.781 334.455,55.815 334.476,55.853 334.488,55.894 334.493,55.938 334.488,55.981 334.476,56.022 334.455,56.061 334.428,56.094 334.427,56.118 334.568,56.256 334.889,56.557
  region net NetJ1_1: 349.546,62.081 350.004,62.066 350.462,62.041 350.918,62.006 351.374,61.961 351.829,61.906 352.283,61.841 352.735,61.767 353.185,61.682 353.633,61.588 354.079,61.484 354.523,61.37 354.964,61.247 355.402,61.114 355.838,60.972 356.27,60.82 356.699,60.658 357.124,60.488 357.545,60.308 357.962,60.119 358.375,59.92 358.784,59.713 359.188,59.497 359.587,59.273 359.981,59.039 360.37,58.797 360.754,58.547 361.132,58.288 361.504,58.022 361.871,57.747 362.231,57.464 362.585,57.173 362.933,56.875 363.288,56.557 349.06,42.329 334.859,56.53 335.244,56.875 335.591,57.173 335.946,57.464 336.306,57.747 336.672,58.022 337.045,58.288 337.423,58.547 337.806,58.797 338.195,59.039 338.59,59.273 338.989,59.497 339.393,59.713 339.801,59.92 340.214,60.119 340.632,60.308 341.053,60.488 341.478,60.658 341.907,60.82 342.339,60.972 342.774,61.114 343.213,61.247 343.654,61.37 344.098,61.484 344.544,61.588 344.992,61.682 345.442,61.767 345.894,61.841 346.348,61.906 346.802,61.961 347.258,62.006 347.715,62.041 348.172,62.066 348.63,62.081 349.088,62.086
  region net GND: 5 vertices and 1 holes, not listed, extent 281.434,8.495 286.731,16.637
Signal Layer 1:
  region: 537 vertices and 2 holes, not listed, extent 0.259,0.259 387.741,81.741
  region: 537 vertices and 2 holes, not listed, extent 0.259,0.259 387.741,81.741
  region: 537 vertices and 3 holes, not listed, extent 0.259,0.259 387.741,81.741
  region net GND: 537 vertices and 441 holes, not listed, extent 0.259,0.259 387.741,81.741
  region: 159.546,56.933 159.643,56.918 159.738,56.894 159.83,56.861 159.919,56.819 160.003,56.769 160.082,56.711 160.155,56.645 160.221,56.572 160.279,56.493 160.329,56.409 160.371,56.32 160.404,56.228 160.428,56.133 160.443,56.036 160.447,55.938 160.443,55.84 160.428,55.743 160.404,55.647 160.399,55.632 160.425,55.764 160.425,55.862 160.425,55.961 160.387,56.154 160.311,56.336 160.202,56.499 160.063,56.639 159.899,56.748 159.717,56.824 159.524,56.862 159.327,56.862 159.133,56.824 158.951,56.748 158.788,56.639 158.648,56.499 158.539,56.336 158.486,56.207 158.491,56.228 158.524,56.32 158.566,56.409 158.616,56.493 158.675,56.572 158.741,56.645 158.813,56.711 158.892,56.769 158.976,56.819 159.065,56.861 159.157,56.894 159.253,56.918 159.35,56.933 159.448,56.937
  pour cut-out: 27.352,55.008 cw(c27.352,56.008) 26.352,56.008 cw(c27.352,56.008) 27.352,57.008 cw(c27.352,56.008) 28.352,56.008 cw(c27.352,56.008)
  pour cut-out: 27.352,55.008 ccw(c27.352,56.008) 28.352,56.008 ccw(c27.352,56.008) 27.352,57.008 ccw(c27.352,56.008) 26.352,56.008 ccw(c27.352,56.008)
  pour cut-out: 57.019,55.008 cw(c57.019,56.008) 56.019,56.008 cw(c57.019,56.008) 57.019,57.008 cw(c57.019,56.008) 58.019,56.008 cw(c57.019,56.008)
  pour cut-out: 27.352,55.008 cw(c27.352,56.008) 26.352,56.008 cw(c27.352,56.008) 27.352,57.008 cw(c27.352,56.008) 28.352,56.008 cw(c27.352,56.008)
  pour cut-out: 333.271,55.938 ccw(c334.271,55.938) 334.271,54.938 ccw(c334.271,55.938) 335.271,55.938 ccw(c334.271,55.938) 334.271,56.938 ccw(c334.271,55.938)
  pour cut-out: 362.938,55.902 ccw(c363.938,55.902) 363.938,54.902 ccw(c363.938,55.902) 364.938,55.902 ccw(c363.938,55.902) 363.938,56.902 ccw(c363.938,55.902)
  pour cut-out: 260.668,55.849 ccw(c261.668,55.849) 261.668,54.849 ccw(c261.668,55.849) 262.668,55.849 ccw(c261.668,55.849) 261.668,56.849 ccw(c261.668,55.849)
  pour cut-out: 230.969,55.849 ccw(c231.969,55.849) 231.969,54.849 ccw(c231.969,55.849) 232.969,55.849 ccw(c231.969,55.849) 231.969,56.849 ccw(c231.969,55.849)
  pour cut-out: 128.781,55.938 ccw(c129.781,55.938) 129.781,54.938 ccw(c129.781,55.938) 130.781,55.938 ccw(c129.781,55.938) 129.781,56.938 ccw(c129.781,55.938)
  pour cut-out: 158.425,55.862 ccw(c159.425,55.862) 159.425,54.862 ccw(c159.425,55.862) 160.425,55.862 ccw(c159.425,55.862) 159.425,56.862 ccw(c159.425,55.862)
  pour cut-out: 283.093,12.901 ccw(c284.093,12.901) 284.093,11.901 ccw(c284.093,12.901) 285.093,12.901 ccw(c284.093,12.901) 284.093,13.901 ccw(c284.093,12.901)
  pour cut-out: 244.82,41 ccw(c246.82,41) 246.82,39 ccw(c246.82,41) 248.82,41 ccw(c246.82,41) 246.82,43 ccw(c246.82,41)
  pour cut-out: 347.09,41 ccw(c349.09,41) 349.09,39 ccw(c349.09,41) 351.09,41 ccw(c349.09,41) 349.09,43 ccw(c349.09,41)
  pour cut-out: 142.6,41 ccw(c144.6,41) 144.6,39 ccw(c144.6,41) 146.6,41 ccw(c144.6,41) 144.6,43 ccw(c144.6,41)
  pour cut-out: 42.17,39 cw(c42.17,41) 40.17,41 cw(c42.17,41) 42.17,43 cw(c42.17,41) 44.17,41 cw(c42.17,41)
Signal Layer 2:
  region net NetJ1_1: 57.322,69.006 57.308,59.192 57.401,59.192 57.401,55.973 57.272,55.973 57.247,55.973 57.147,55.973 57.122,55.973 56.615,55.973 56.615,59.194 56.699,59.194 56.725,69.01 52.037,69.01 52.037,47.751 51.958,47.751 51.958,46.751 51.873,46.751 51.873,44.627 52.718,43.778 88.745,43.775 88.986,43.534 88.937,43.417 52.62,43.417 51.492,44.544 51.492,46.751 51.408,46.751 51.408,47.751 51.327,47.751 51.327,68.583 51.455,68.68 51.675,68.9 51.684,69.032 51.904,69.247 57.081,69.247
  region net NetJ1_1: 358.614,68.942 358.63,68.942 358.882,69.194 363.994,69.194 364.262,68.926 364.243,59.133 364.335,59.133 364.335,55.897 363.548,55.897 363.548,59.14 363.64,59.14 363.658,68.942 358.979,68.942 358.968,47.672 358.897,47.672 358.897,46.672 358.812,46.672 358.812,44.406 357.81,43.404 305.791,43.404 305.789,28.826 305.081,28.118 296.05,28.118 296.05,28.2 295.05,28.2 295.05,28.27 199.105,28.27 199.105,21.836 213.065,21.836 213.065,21.739 214.065,21.739 214.065,21.654 283.928,21.654 284.261,21.321 284.262,12.873 283.891,12.873 283.891,21.285 283.794,21.285 214.065,21.285 214.065,21.2 213.076,21.2 213.065,21.189 213.065,21.118 199.085,21.118 198.389,21.815 198.389,28.648 295.05,28.652 295.05,28.739 296.05,28.739 296.05,28.826 305.077,28.826 305.077,43.404 302.451,43.404 257.043,43.408 256.148,44.304 256.148,46.584 256.062,46.584 256.062,47.584 255.989,47.584 255.989,68.853 251.36,68.853 232.358,68.857 232.306,68.805 232.289,59.072 232.381,59.072 232.381,55.843 232.034,55.854 231.892,55.843 231.597,55.843 231.597,59.072 231.688,59.072 231.705,68.833 232.258,69.386 255.834,69.386 256.337,68.882 256.561,69.106 261.739,69.106 261.972,68.873 261.973,59.039 262.065,59.038 262.065,55.807 261.993,55.807 261.867,55.807 261.592,55.807 261.542,55.807 261.274,55.807 261.274,59.04 261.378,59.04 261.399,68.853 261.29,68.853 256.708,68.852 256.698,68.843 256.698,47.584 256.618,47.584 256.618,46.584 256.529,46.584 256.529,44.473 257.228,43.77 302.443,43.767 305.077,43.771 305.435,43.412 305.451,43.412 305.809,43.771 357.656,43.773 358.434,44.542 358.434,46.672 358.347,46.672 358.347,47.672 358.265,47.672 358.265,68.942 353.63,68.942 334.612,68.946 334.587,59.17 334.694,59.17 334.694,55.942 334.295,55.945 333.904,55.945 333.904,59.178 333.995,59.178 334.012,68.946 334.544,69.479 358.077,69.479
  region net NetJ1_1: 100.586,28.832 101.285,28.112 101.293,28.832
  region net NetJ1_1: 27.925,69.2 27.925,69.027 27.641,69.027 27.641,59.245 27.732,59.245 27.732,56.009 27.556,56.009 27.608,56.009 27.541,56.009 27.555,56.009 27.352,56.009 27.149,56.009 26.953,56.009 26.949,59.246 27.04,59.246 27.04,69.008 27.579,69.546
  region net NetJ1_1: 51.694,69.026 51.682,68.907 51.354,68.579 51.34,68.593 51.34,69.016 51.329,69.027 28.052,69.027 27.925,69.027 27.925,69.2 27.579,69.546 51.174,69.546
  region net NetJ1_1: 101.818,28.75 102.818,28.75 102.818,28.648 199.303,28.648 199.303,28.269 102.818,28.269 102.818,28.2 101.818,28.2 101.818,28.112 101.284,28.112 101.279,28.835 101.818,28.835
  region net NetJ1_1: 154.107,68.954 154.123,68.954 154.349,69.18 159.512,69.18 159.731,68.962 159.731,59.138 159.826,59.138 159.826,55.852 159.713,55.852 159.394,55.852 159.03,55.852 159.03,59.138 159.119,59.138 159.137,68.932 154.474,68.932 154.474,47.685 154.394,47.685 154.394,46.685 154.306,46.685 154.306,44.419 153.303,43.417 101.293,43.417 101.293,28.834 100.583,28.834 100.579,43.417 97.944,43.417 89.077,43.421 88.927,43.421 88.654,43.779 88.927,43.78 100.556,43.798 100.928,43.424 100.943,43.424 101.317,43.798 153.164,43.799 153.921,44.552 153.924,46.685 153.84,46.685 153.84,47.685 153.764,47.685 153.764,68.942 130.112,68.947 130.095,59.161 130.191,59.161 130.191,55.944 129.999,55.944 129.781,55.944 129.661,55.944 129.411,55.944 129.411,59.162 129.5,59.162 129.517,68.928 130.046,69.456 149.115,69.456 153.601,69.46
  pour cut-out: 42.17,39 cw(c42.17,41) 40.17,41 cw(c42.17,41) 42.17,43 cw(c42.17,41) 44.17,41 cw(c42.17,41)
  pour cut-out: 142.6,41 ccw(c144.6,41) 144.6,39 ccw(c144.6,41) 146.6,41 ccw(c144.6,41) 144.6,43 ccw(c144.6,41)
  pour cut-out: 244.82,41 ccw(c246.82,41) 246.82,39 ccw(c246.82,41) 248.82,41 ccw(c246.82,41) 246.82,43 ccw(c246.82,41)
  pour cut-out: 347.09,41 ccw(c349.09,41) 349.09,39 ccw(c349.09,41) 351.09,41 ccw(c349.09,41) 349.09,43 ccw(c349.09,41)
Bottom Layer:
  region net GND: 537 vertices and 439 holes, not listed, extent 0.259,0.259 387.741,81.741
  region: 42.171,43 42.169,43 42.17,43
  region: 42.259,43.066 42.401,43.05 42.541,43.025 42.68,42.99 42.815,42.945 42.947,42.89 43.075,42.826 43.197,42.753 43.315,42.672 43.426,42.582 43.53,42.485 43.628,42.38 43.668,42.331 43.445,42.554 43.117,42.772 42.753,42.923 42.367,43 41.973,43 41.587,42.923 41.223,42.772 40.895,42.554 40.616,42.275 40.398,41.947 40.247,41.583 40.17,41.197 40.17,41 40.17,40.803 40.247,40.417 40.398,40.053 40.532,39.851 40.515,39.872 40.434,39.99 40.361,40.112 40.297,40.24 40.242,40.372 40.197,40.507 40.162,40.646 40.137,40.786 40.121,40.928 40.116,41.071 40.121,41.213 40.137,41.355 40.162,41.496 40.197,41.634 40.242,41.77 40.297,41.902 40.361,42.029 40.434,42.152 40.515,42.269 40.605,42.38 40.702,42.485 40.807,42.582 40.918,42.672 41.035,42.753 41.158,42.826 41.285,42.89 41.417,42.945 41.553,42.99 41.691,43.025 41.832,43.05 41.974,43.066 42.116,43.071
  region: 65 vertices and 1 holes, not listed, extent 40.116,39.851 43.668,43.071
  pour cut-out: 42.17,39 cw(c42.17,41) 40.17,41 cw(c42.17,41) 42.17,43 cw(c42.17,41) 44.17,41 cw(c42.17,41)
  pour cut-out: 144.6,39 cw(c144.6,41) 142.6,41 cw(c144.6,41) 144.6,43 cw(c144.6,41) 146.6,41 cw(c144.6,41)
  pour cut-out: 246.82,39 cw(c246.82,41) 244.82,41 cw(c246.82,41) 246.82,43 cw(c246.82,41) 248.82,41 cw(c246.82,41)
  pour cut-out: 349.09,39 cw(c349.09,41) 347.09,41 cw(c349.09,41) 349.09,43 cw(c349.09,41) 351.09,41 cw(c349.09,41)
  pour cut-out: 362.938,55.902 ccw(c363.938,55.902) 363.938,54.902 ccw(c363.938,55.902) 364.938,55.902 ccw(c363.938,55.902) 363.938,56.902 ccw(c363.938,55.902)
  pour cut-out: 333.271,55.938 ccw(c334.271,55.938) 334.271,54.938 ccw(c334.271,55.938) 335.271,55.938 ccw(c334.271,55.938) 334.271,56.938 ccw(c334.271,55.938)
  pour cut-out: 42.17,39 cw(c42.17,41) 40.17,41 cw(c42.17,41) 42.17,43 cw(c42.17,41) 44.17,41 cw(c42.17,41)
  pour cut-out: 144.654,38.929 cw(c144.654,40.929) 142.654,40.929 cw(c144.654,40.929) 144.654,42.929 cw(c144.654,40.929) 146.654,40.929 cw(c144.654,40.929)
  pour cut-out: 246.723,39.08 cw(c246.723,41.08) 244.723,41.08 cw(c246.723,41.08) 246.723,43.08 cw(c246.723,41.08) 248.723,41.08 cw(c246.723,41.08)
  pour cut-out: 349.144,38.929 cw(c349.144,40.929) 347.144,40.929 cw(c349.144,40.929) 349.144,42.929 cw(c349.144,40.929) 351.144,40.929 cw(c349.144,40.929)
  pour cut-out: 362.938,55.902 ccw(c363.938,55.902) 363.938,54.902 ccw(c363.938,55.902) 364.938,55.902 ccw(c363.938,55.902) 363.938,56.902 ccw(c363.938,55.902)
  pour cut-out: 27.352,55.008 cw(c27.352,56.008) 26.352,56.008 cw(c27.352,56.008) 27.352,57.008 cw(c27.352,56.008) 28.352,56.008 cw(c27.352,56.008)
  pour cut-out: 57.019,55.008 cw(c57.019,56.008) 56.019,56.008 cw(c57.019,56.008) 57.019,57.008 cw(c57.019,56.008) 58.019,56.008 cw(c57.019,56.008)
  pour cut-out: 128.781,55.938 ccw(c129.781,55.938) 129.781,54.938 ccw(c129.781,55.938) 130.781,55.938 ccw(c129.781,55.938) 129.781,56.938 ccw(c129.781,55.938)
  pour cut-out: 158.448,55.938 ccw(c159.448,55.938) 159.448,54.938 ccw(c159.448,55.938) 160.448,55.938 ccw(c159.448,55.938) 159.448,56.938 ccw(c159.448,55.938)
  pour cut-out: 230.969,55.849 ccw(c231.969,55.849) 231.969,54.849 ccw(c231.969,55.849) 232.969,55.849 ccw(c231.969,55.849) 231.969,56.849 ccw(c231.969,55.849)
  pour cut-out: 260.668,55.849 ccw(c261.668,55.849) 261.668,54.849 ccw(c261.668,55.849) 262.668,55.849 ccw(c261.668,55.849) 261.668,56.849 ccw(c261.668,55.849)
  pour cut-out: 333.271,55.938 ccw(c334.271,55.938) 334.271,54.938 ccw(c334.271,55.938) 335.271,55.938 ccw(c334.271,55.938) 334.271,56.938 ccw(c334.271,55.938)
  pour cut-out: 362.938,55.902 ccw(c363.938,55.902) 363.938,54.902 ccw(c363.938,55.902) 364.938,55.902 ccw(c363.938,55.902) 363.938,56.902 ccw(c363.938,55.902)
  pour cut-out: 283.1,12.9 ccw(c284.1,12.9) 284.1,11.9 ccw(c284.1,12.9) 285.1,12.9 ccw(c284.1,12.9) 284.1,13.9 ccw(c284.1,12.9)

## Silkscreen, mask and mechanical layers (free items; w line width, h text height)
Mechanical 4:
  lines w0: 0,0 0,82 71,82 71,81 ccw(c74,81) 71.879,78.879 ccw(c74,81) 74,78 89,78 ccw(c89,81) 91.121,78.879 ccw(c89,81) 92,81 92,82 250,82 250,81 ccw(c253,81) 250.879,78.879 ccw(c253,81) 253,78 268,78 ccw(c268,81) 270.121,78.879 ccw(c268,81) 271,81 271,82 388,82 388,0 286.734,0 286.734,7.1 ccw(c285.734,7.1) 286.441,7.807 ccw(c285.734,7.1) 285.734,8.1 282.432,8.1 ccw(c282.432,7.1) 281.725,7.807 ccw(c282.432,7.1) 281.432,7.1 281.432,0 271,0 271,1 ccw(c268,1) 270.121,3.121 ccw(c268,1) 268,4 253,4 ccw(c253,1) 250.879,3.121 ccw(c253,1) 250,1 250,0 92,0 92,1 ccw(c89,1) 91.121,3.121 ccw(c89,1) 89,4 74,4 ccw(c74,1) 71.879,3.121 ccw(c74,1) 71,1 71,0 0,0 ; 0.009,-0.001 0.009,82 71.009,82 71.009,81 ccw(c74.009,81) 71.888,78.878 ccw(c74.009,81) 74.009,77.999 89.009,77.999 ccw(c89.009,81) 91.131,78.878 ccw(c89.009,81) 92.009,81 92.009,82 250.009,82 250.009,81 ccw(c253.009,81) 250.888,78.878 ccw(c253.009,81) 253.009,77.999 268.009,77.999 ccw(c268.009,81) 270.131,78.878 ccw(c268.009,81) 271.009,81 271.009,82 388.009,82 388.009,-0.001 286.743,-0.001 286.743,7.1 ccw(c285.743,7.1) 286.45,7.807 ccw(c285.743,7.099) 285.743,8.099 282.441,8.099 ccw(c282.441,7.099) 281.734,7.807 ccw(c282.441,7.1) 281.441,7.1 281.441,-0.001 271.009,-0.001 271.009,1 ccw(c268.009,0.999) 270.131,3.121 ccw(c268.009,0.999) 268.009,3.999 253.009,3.999 ccw(c253.009,0.999) 250.888,3.121 ccw(c253.009,0.999) 250.009,1 250.009,-0.001 92.009,-0.001 92.009,1 ccw(c89.009,0.999) 91.131,3.121 ccw(c89.009,0.999) 89.009,3.999 74.009,3.999 ccw(c74.009,0.999) 71.888,3.121 ccw(c74.009,0.999) 71.009,1 71.009,-0.001 0.009,-0.001
Mechanical 10:
  the board outline again, w0
Mechanical 13:
  lines w0.2: -141.302,-204.778 -70.302,-204.778